# EAGLE board untitled (EAGLE 9.6.2)
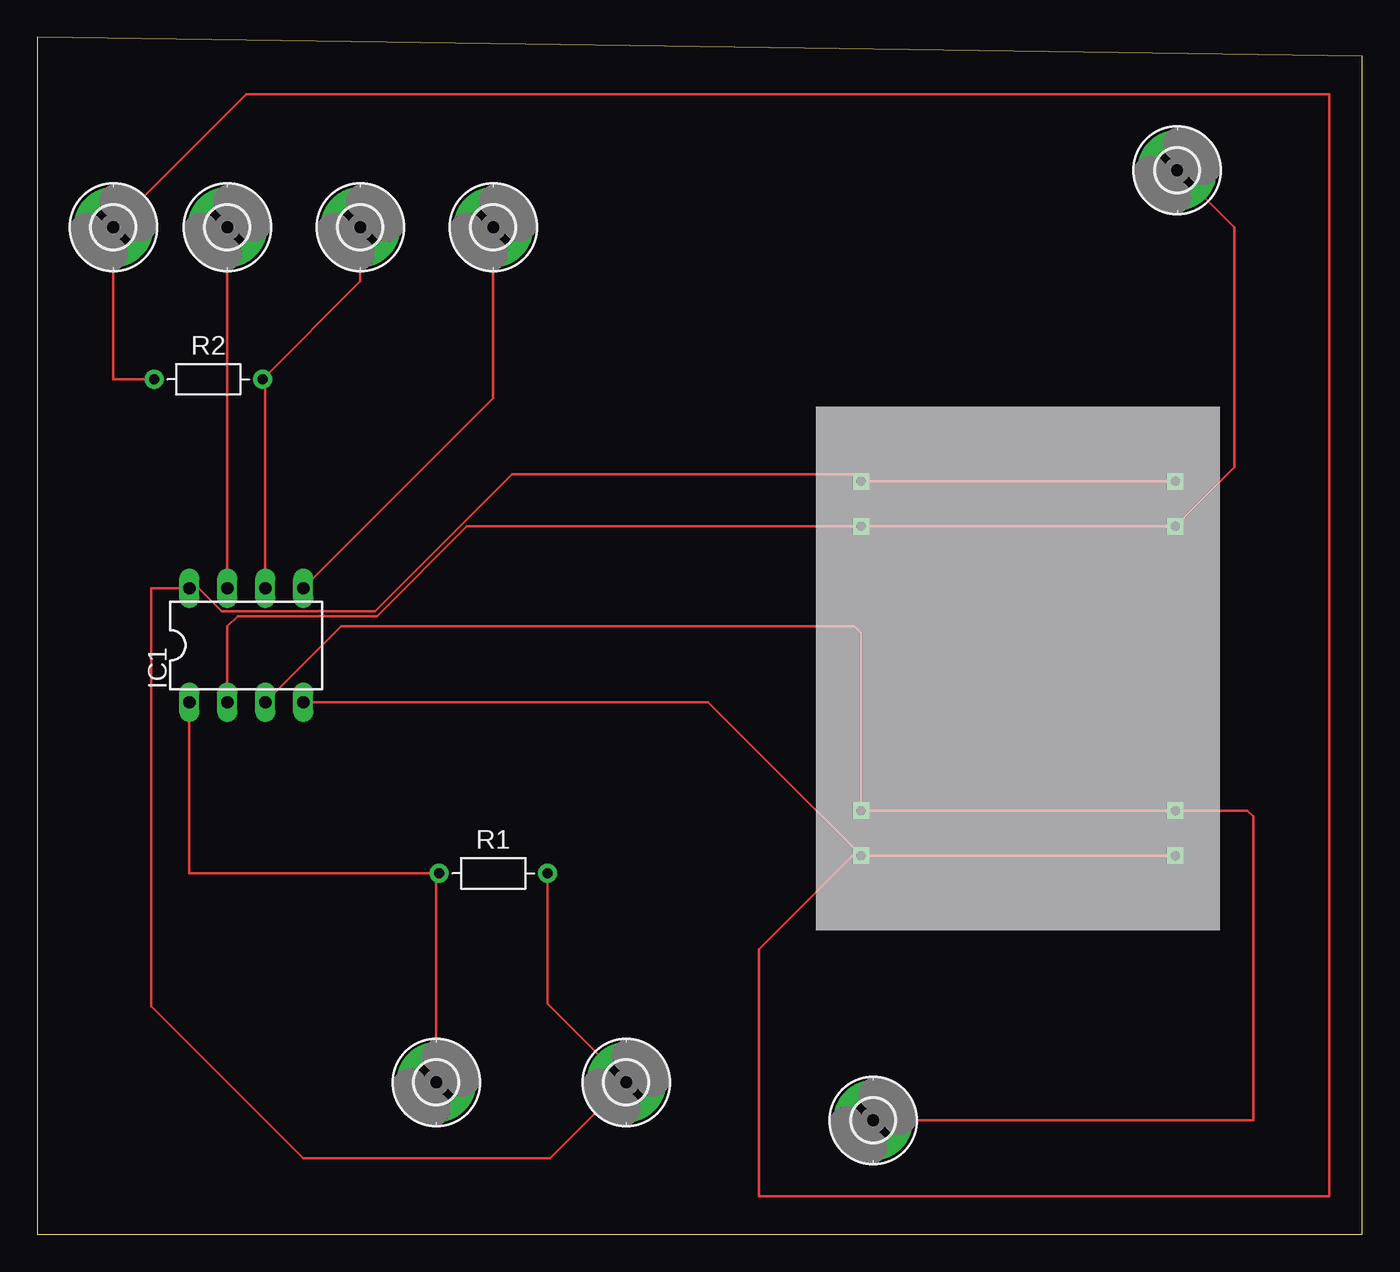
[diagram p0: board, top side]

Size 88.57 x 80 mm. Coordinates in mm from the lower left corner, seen from the top.
Outline: 0,0 88.57,0 88.57,78.73 0,80 0,0
Copper layers (1*16): Top 0.035mm / dielectric 1.5mm / Bottom 0.035mm
Design rules "default": minimum track width 6mil, minimum drill 0.35mm, track to track 6mil, track to pad 6mil, pad to pad 6mil, via to via 6mil, smd to smd 6mil, copper to edge 40mil, drill to drill 6mil, minimum pad ring 10mil, minimum via ring 8mil, stop-mask expansion 4mil, vias tented up to drill 0mil, thermal gap 10mil

## Footprints (pad centres in the part's own frame; a part is rotated, then mirrored left to right if it is on the bottom)
2,8-PAD = drill 2.8 pad 5.334: B2,8 0,0
DIL08 = drill 0.813 long: 1 -3.81,-3.81; 2 -1.27,-3.81; 3 1.27,-3.81; 4 3.81,-3.81; 5 3.81,3.81; 6 1.27,3.81; 7 -1.27,3.81; 8 -3.81,3.81
RESAD724W46L381D178B = drill 0.66 pad 1.26: 1 -3.62,0; 2 3.62,0
JOYPAD = drill 0.6 square: 1 3,30; 2 3,27; 3 3,8; 4 3,5; 5 24,5; 6 24,8; 7 24,27; 8 24,30

## Placement (x,y rotation side)
H1  MOUNT-PAD-ROUND2.8  [2,8-PAD]  12.7,67.31 0 top
H2  MOUNT-PAD-ROUND2.8  [2,8-PAD]  21.59,67.31 0 top
H3  MOUNT-PAD-ROUND2.8  [2,8-PAD]  30.48,67.31 0 top
H4  MOUNT-PAD-ROUND2.8  [2,8-PAD]  55.88,7.62 0 top
H5  MOUNT-PAD-ROUND2.8  [2,8-PAD]  39.37,10.16 0 top
H6  MOUNT-PAD-ROUND2.8  [2,8-PAD]  26.67,10.16 0 top
H7  MOUNT-PAD-ROUND2.8  [2,8-PAD]  76.2,71.12 0 top
H8  MOUNT-PAD-ROUND2.8  [2,8-PAD]  5.08,67.31 0 top
IC1  [DIL08]  13.97,39.37 0 top
R1  [RESAD724W46L381D178B]  30.48,24.13 0 top
R2  [RESAD724W46L381D178B]  11.43,57.15 0 top
U$1  JOYPAD  [JOYPAD]  52.07,20.32 0 top

## Library data of the parts
H1-H8 = holes
IC1 = ic-package
R1 R2 = Resistor; CATEGORY: Resistor; SUB-CATEGORY: Fixed
U$1 = Joypad_exe

## Nets
N$1: H5.B2,8 IC1.8 R1.2 U$1.1 U$1.8
N$3: H6.B2,8 IC1.1 R1.1
N$5: H7.B2,8 IC1.2 U$1.2 U$1.7
N$10: H1.B2,8 IC1.7
N$11: H2.B2,8 IC1.6 R2.2
N$12: H3.B2,8 IC1.5
N$13: H8.B2,8 IC1.4 R2.1 U$1.4 U$1.5
N$16: H4.B2,8 IC1.3 U$1.3 U$1.6

## Tracks (layer width: path | path; a pad name or v marks a point on that pad's centre or on a via)
N$1
  Top 0.152: U$1.8 U$1.1 54.59,50.8 31.75,50.8 22.58,41.63 12.33,41.63 10.78,43.18 IC1.8 7.62,43.18 7.62,15.24 17.78,5.08 34.29,5.08 H5.B2,8 34.1,15.43 R1.2
N$3
  Top 0.152: H6.B2,8 26.67,23.94 R1.1 10.16,24.13 IC1.1
N$5
  Top 0.152: IC1.2 12.7,40.64 13.39,41.33 22.71,41.33 28.7,47.32 U$1.2 U$1.7 80.01,51.26 80.01,67.31 H7.B2,8
N$10
  Top 0.152: H1.B2,8 IC1.7
N$11
  Top 0.152: H2.B2,8 21.59,63.69 R2.2 15.24,56.96 IC1.6
N$12
  Top 0.152: H3.B2,8 30.48,55.88 IC1.5
N$13
  Top 0.152: R2.1 5.08,57.15 H8.B2,8 13.97,76.2 86.36,76.2 86.36,2.54 48.26,2.54 48.26,19.05 54.8,25.59 | U$1.5 U$1.4 54.8,25.59 | IC1.4 44.83,35.56 54.8,25.59
N$16
  Top 0.152: H4.B2,8 81.28,7.62 81.28,27.94 80.9,28.32 U$1.6 U$1.3 55.07,40.18 54.61,40.64 20.32,40.64 IC1.3